# Altium PCB PCB.PcbDoc
Units mil, origin at the board's own origin, x right, y up, seen from the top; angles counter-clockwise.
Board outline 2244.09 x 2125.98 mil, 2 copper layers (Top Layer, Bottom Layer); 47 components, 27 nets, 113 pads, 88 vias.
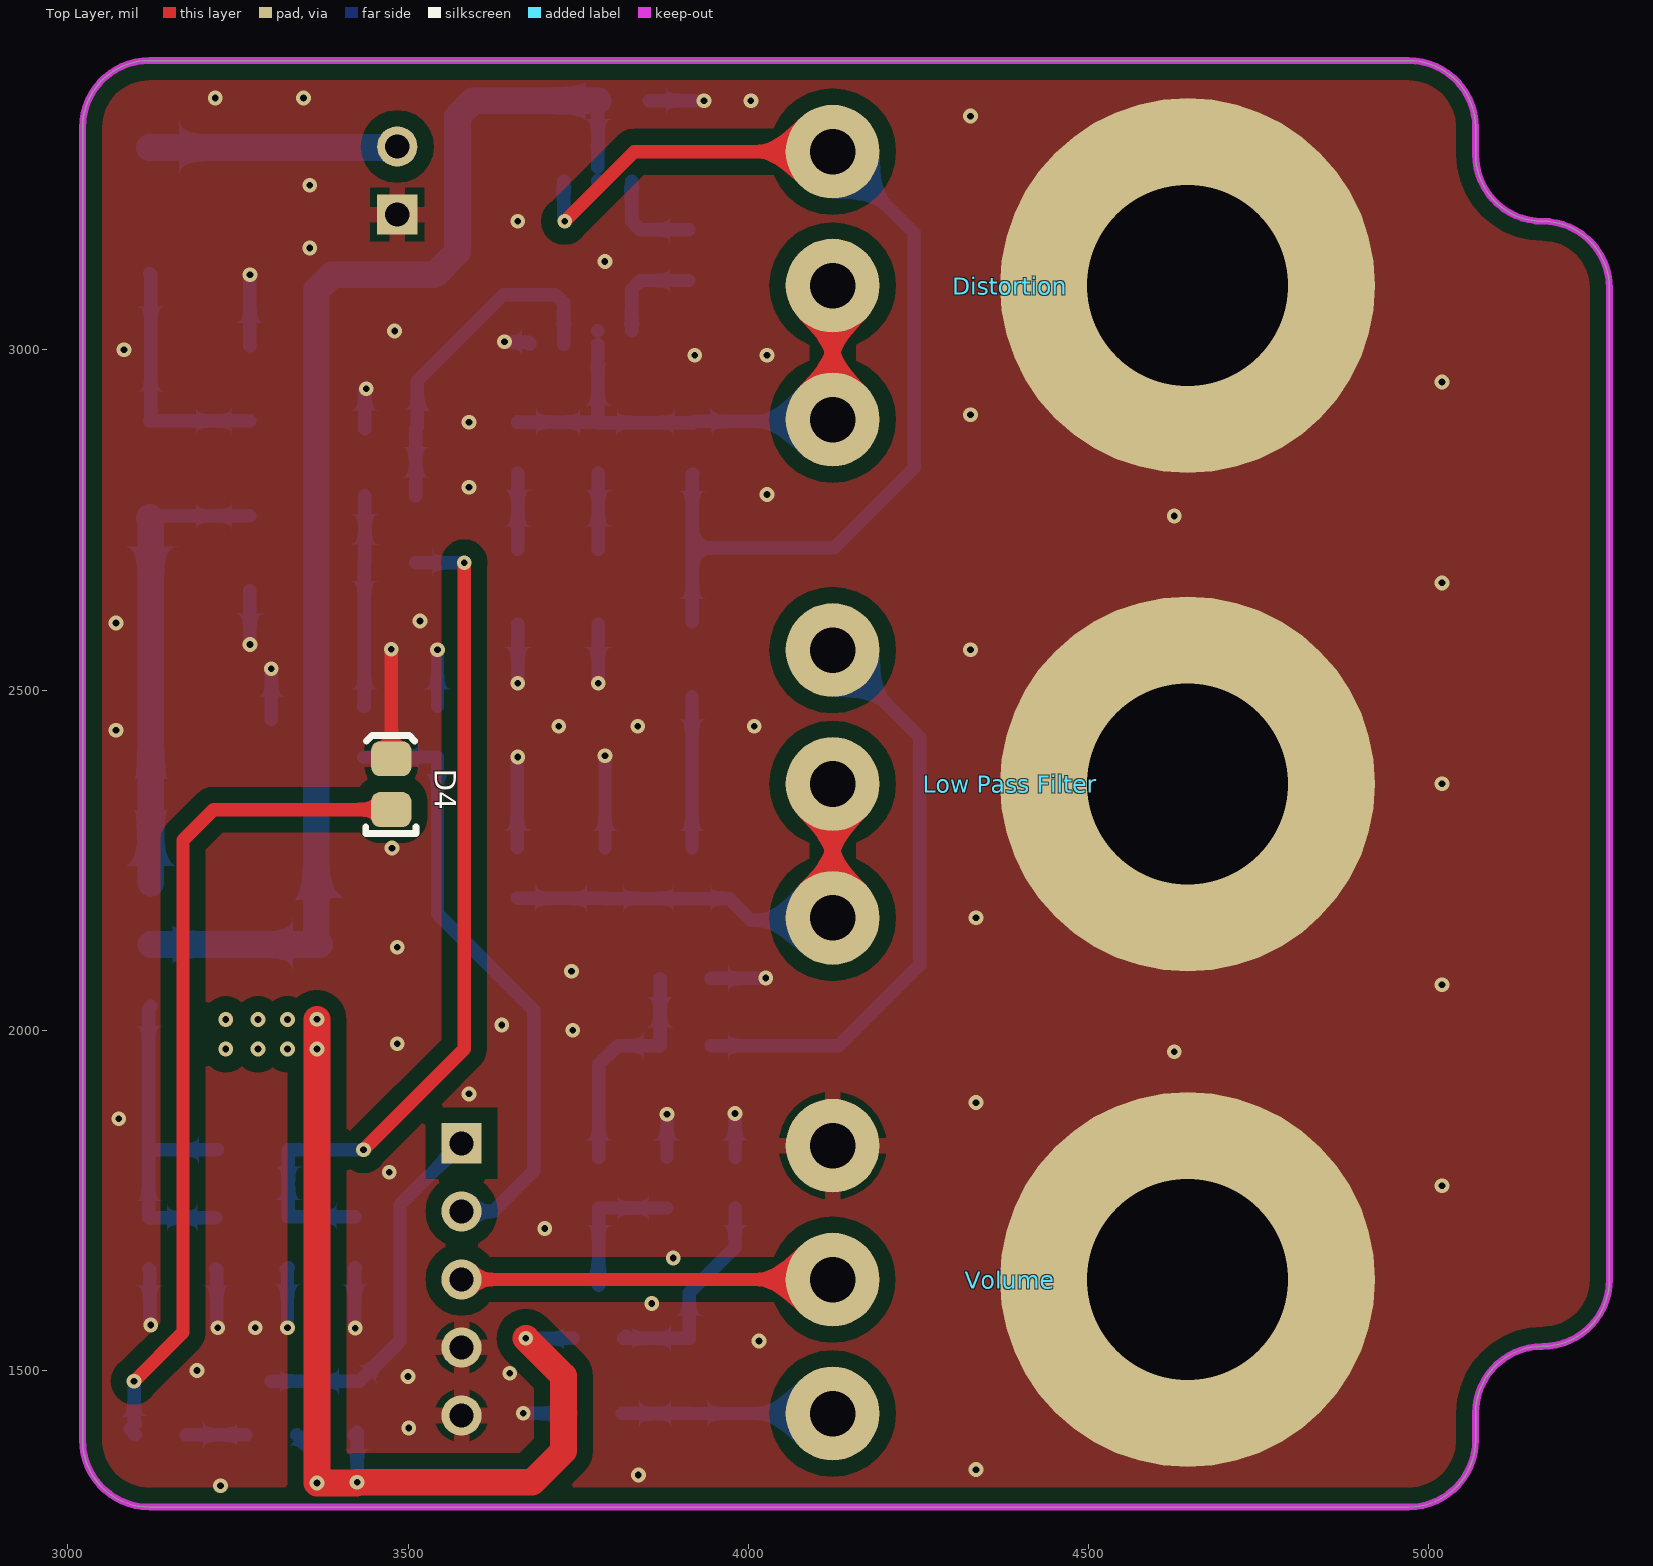
[diagram p0: Top Layer view]
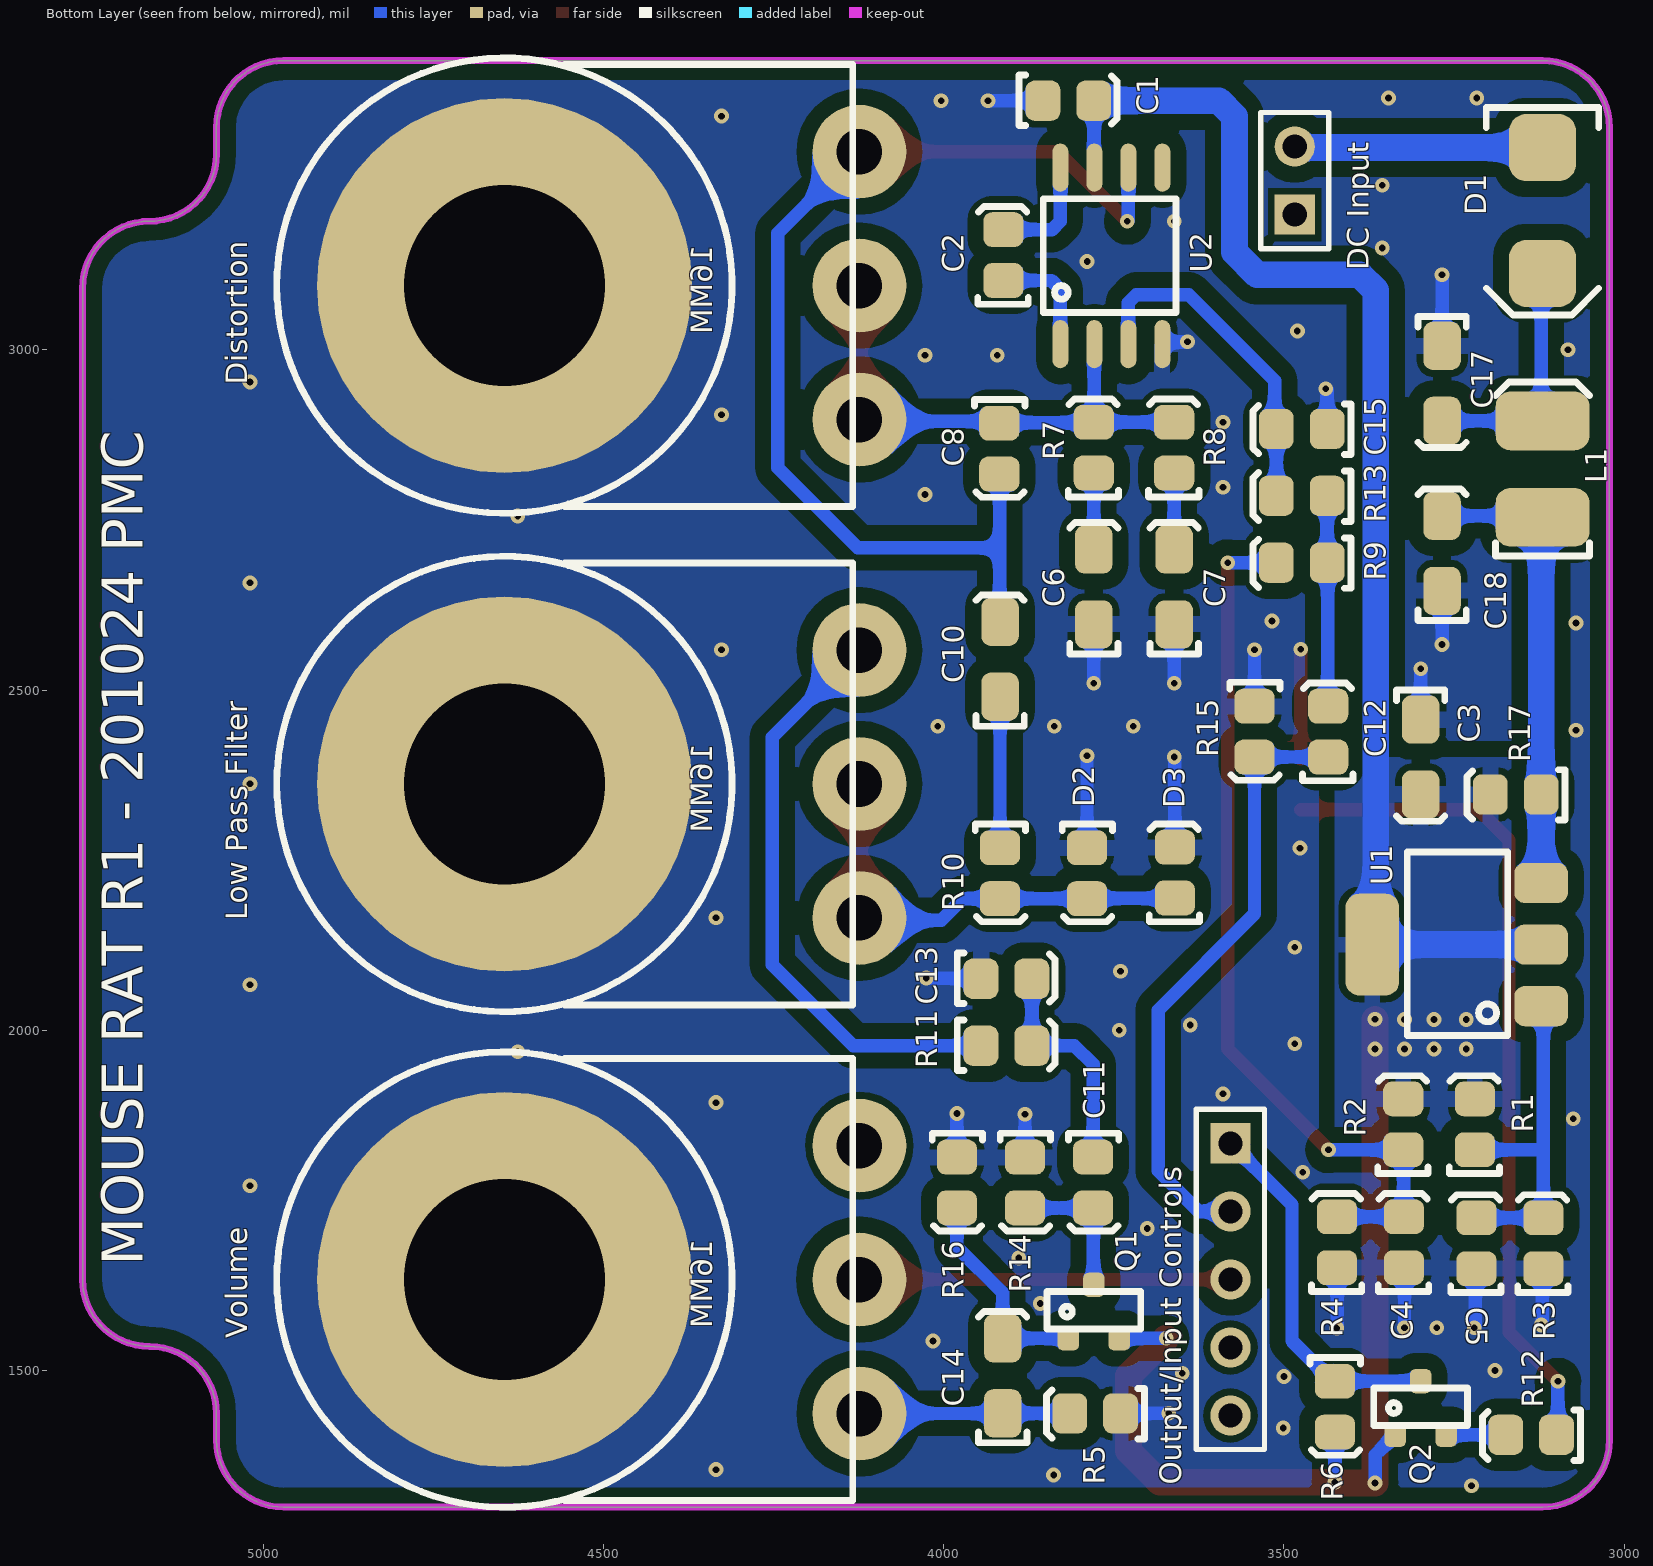
[diagram p1: Bottom Layer view, seen from below]
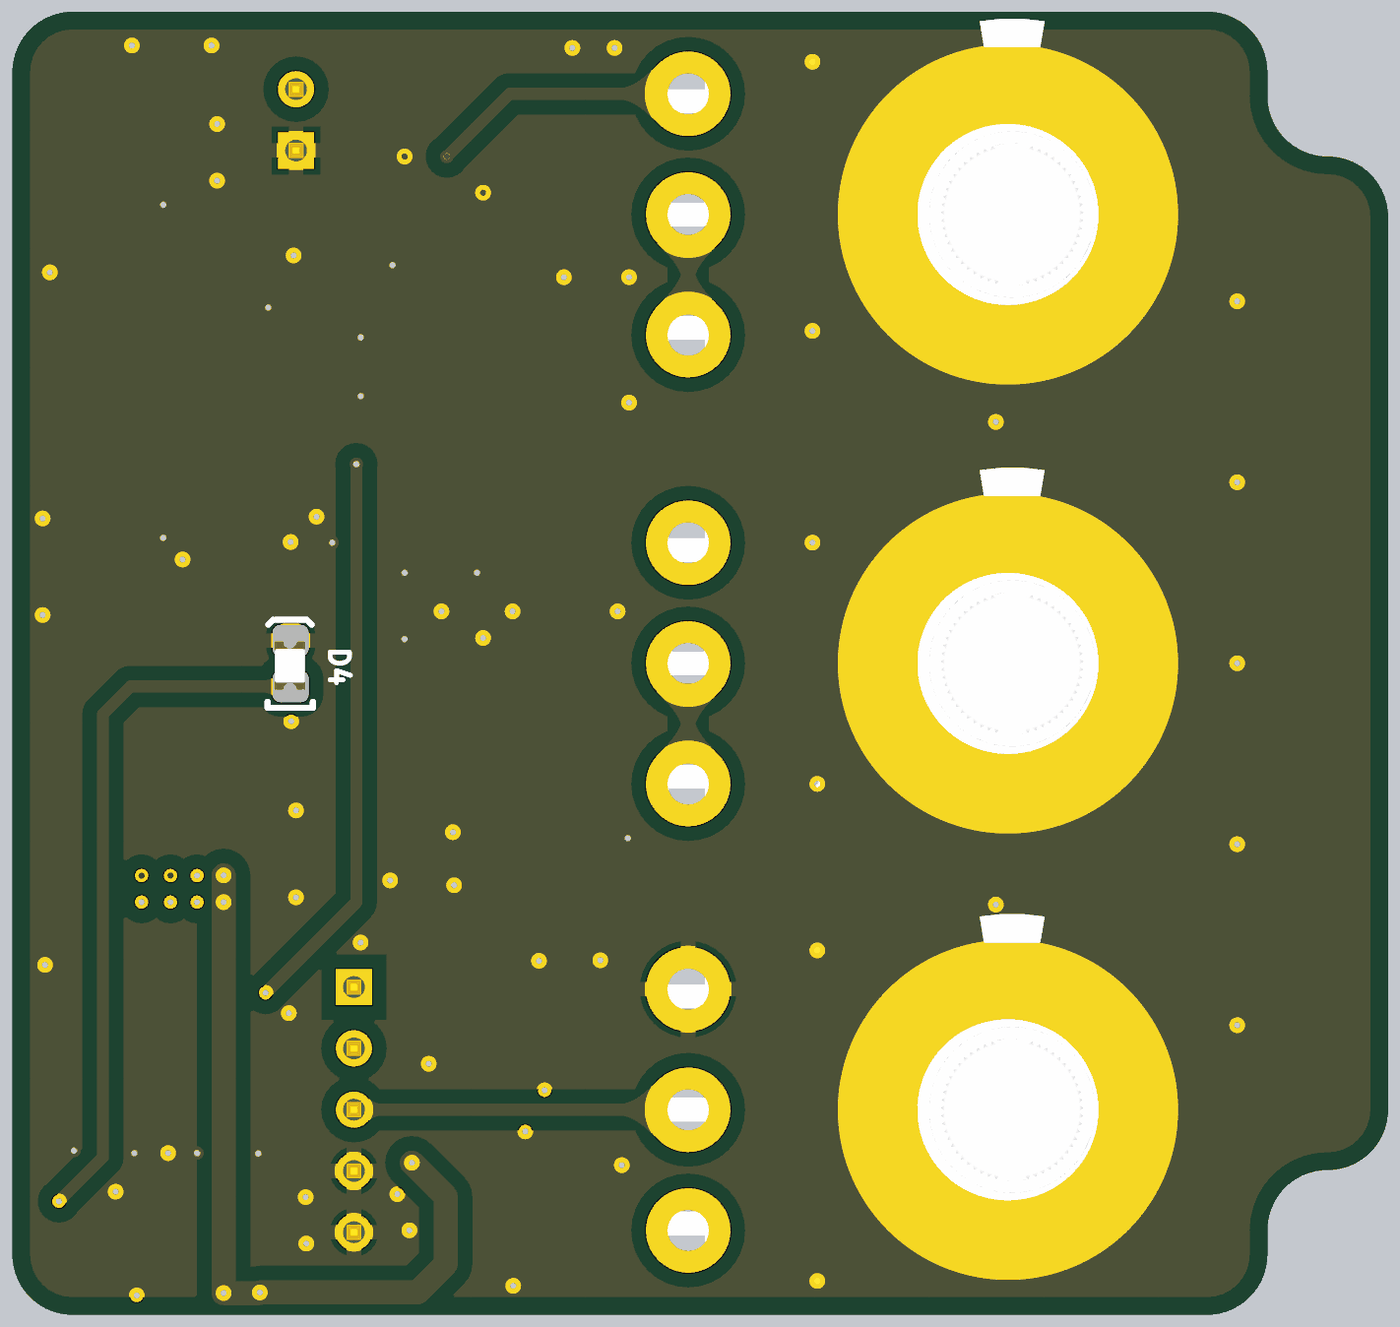
[diagram p2: 3D render of the assembled board from above, using the file's embedded part models]
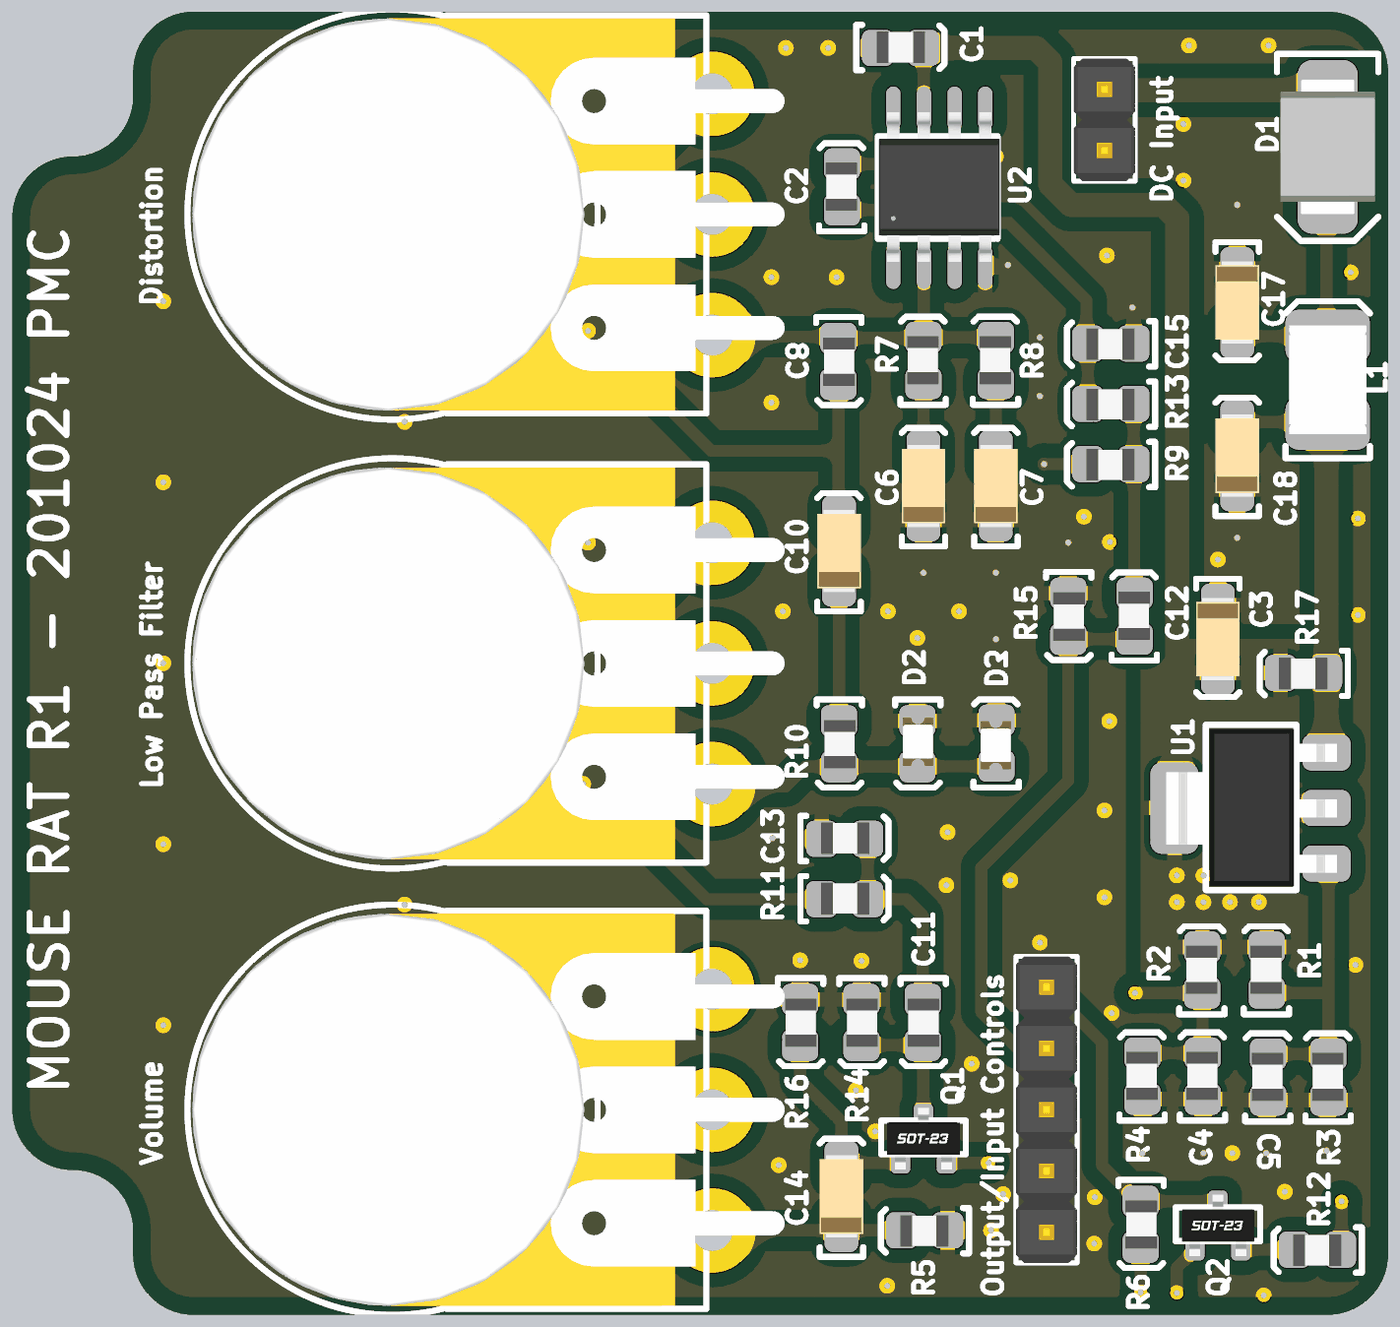
[diagram p3: 3D render of the assembled board from below, using the file's embedded part models]

## Layer stack, top to bottom
Top Solder: solder mask 0.4, Solder Resist, Dk 3.5
Top Layer: signal copper 1.4
Dielectric 1: dielectric 12.6, FR-4, Dk 4.8
Bottom Layer: signal copper 1.4
Bottom Solder: solder mask 0.4, Solder Resist, Dk 3.5

## Board outline
3021.65,1397.64 ccw(c3120.08,1397.64) 3120.08,1299.21 4970.47,1299.21 ccw(c4970.47,1397.64) 5068.9,1397.64 5068.9,1437.01 cw(c5167.32,1437.01) 5167.32,1535.43 ccw(c5167.32,1633.86) 5265.75,1633.86 5265.75,3090.55 ccw(c5167.32,3090.55) 5167.32,3188.98 cw(c5167.32,3287.4) 5068.9,3287.4 5068.9,3326.77 ccw(c4970.47,3326.77) 4970.47,3425.2 3120.08,3425.2 ccw(c3120.08,3326.77) 3021.65,3326.77

## Design rules (kind name [scope] priority, off if disabled: settings)
Clearance [All] p1: gap=10 ignorepadtopadclearanceinfootprint=FALSE except(0: Arc-Hole Track-Hole SMDPad-Hole THPad-Hole Via-Hole Fill-Hole Poly-Hole Region-Hole Text-Hole; 3.94: THPad-THPad; 6: Arc-SMDPad Track-SMDPad SMDPad-SMDPad; 7.87: Arc-THPad Track-THPad SMDPad-THPad THPad-Via; 8: Arc-Arc Arc-Track Arc-Region Track-Track Track-Region SMDPad-Region THPad-Region Via-Region Fill-Region Poly-Region Region-Region; 23.62: Arc-Poly Track-Poly SMDPad-Poly THPad-Poly Via-Poly Fill-Poly Poly-Poly)
Height [All] p1: minheight=0 maxheight=1968.5 prefheight=500
HoleSize [All] p1: absolutevalues=TRUE maxlimit=393.7 minlimit=1 maxpercent=80.000 minpercent=20.000
PlaneClearance [All] p1: clearance=15.75
PlaneConnect [All] p1: pad.planeconnectstyle=Relief pad.reliefexpansion=20 pad.reliefentries=4 pad.reliefconductorwidth=31.5 pad.reliefairgap=10 via.planeconnectstyle=Direct via.reliefexpansion=20 via.reliefentries=4 via.reliefconductorwidth=31.5 via.reliefairgap=10
PolygonConnect PolygonConnect_1 [HasFootprint('Volume-0  Or Filter-0 Or Distortion-0') vs InNet('0V')] p1: connectstyle=Direct reliefconductorwidth=23.62 reliefentries=4 polygonreliefangle="90 Angle" airgapwidth=10
PolygonConnect [All] p2: thpad.connectstyle=Relief thpad.reliefconductorwidth=23.62 thpad.reliefentries=4 thpad.polygonreliefangle="90 Angle" thpad.airgapwidth=10 smdpad.connectstyle=Relief smdpad.reliefconductorwidth=23.62 smdpad.reliefentries=4 smdpad.polygonreliefangle="90 Angle" smdpad.airgapwidth=10 via.connectstyle=Direct via.reliefconductorwidth=23.62 via.reliefentries=4 via.polygonreliefangle="90 Angle" via.airgapwidth=10
RoutingVias [All] p1: holewidth=28 width=50 viastyle="Through Hole" minholewidth=8 minwidth=10 maxholewidth=28 maxwidth=50
SolderMaskExpansion [All] p1: expansion=2 istentingtop=FALSE
Width [All] p1: maxlimit=118.11 minlimit=5 preferedwidth=19.68
26 further rules are at their usual default settings.

## Classes and differential pairs
component class "U_Active Indicator": D4 Q2 R6 R12
component class U_Schematic: C1 C2 C6 C7 C8 C10 C11 C12 C13 C14 C15 D2 D3 Distortion "Low Pass Filter" Q1 R5 R7 R8 R9 R10 R11 R13 R14 R15 R16 U2 Volume
component class "U_Power Supply": C3 C4 C5 C17 C18 D1 L1 R1 R2 R3 R4 R17 U1
component class "Top Level": "DC Input" "Output/Input Controls"

## Components (designator, comment, footprint, x,y, rotation, side; value= is the part's Value field where it differs from the comment)
C1 "100nF" 0805 3816.46,3367.17 r180 bottom
C2 "30pF" 0805 3913.39,3139.76 r90 bottom
C3 "4.7µF" 1206 3299.21,2354.33 r270 bottom
C4 "1µF" 0805 3324.8,1688.98 r90 bottom
C5 "1µF" 0805 3218.3,1687.48 r90 bottom
C6 "4.7µF" 1206 3779.53,2698.82 r90 bottom
C7 "2.2µF" 1206 3661.42,2698.82 r90 bottom
C8 "100pF" 0805 3917.32,2854.33 r270 bottom
C10 "4.7µF" 1206 3917.32,2592.52 r90 bottom
C11 "22nF" 0805 3779.53,1775.76 r270 bottom
C12 "22nF" 0805 3436.07,2439.45 r90 bottom
C13 "2.2nF" 0805 3907.48,2076.77 r180 bottom
C14 "1µF" 1206 3913.39,1539.37 r90 bottom
C15 "1nF" 0805 3474.41,2882.83 r0 bottom
C17 "4.7µF" 1206 3267.59,2903.54 r270 bottom
C18 "4.7µF" 1206 3267.72,2748.03 r90 bottom
D1 "SD560BTR" "SMB Diode" 3120.08,3287.4 r270 bottom
D2 "Red" "0805 LED" 3788.44,2230.38 r270 bottom
D3 "Red" "0805 LED" 3661.42,2232.28 r90 bottom
D4 "Red" "0805 LED" 3474.41,2362.2 r90 top
"DC Input" "2.54mm" "TH 2.54mm Header 1x2" 3484.25,3198.82 r90 bottom
Distortion "A100k (Var)" "16mm PCB Mount Pot" 4645.67,3094.43 r270 top locked
L1 "12uH" 1812 3120.08,2824.8 r90 bottom
"Low Pass Filter" "A100k (Var)" "16mm PCB Mount Pot" 4645.67,2361.94 r270 top
"Output/Input Controls" "2.54mm" "TH 2.54mm Header 1x5" 3578.74,1833.86 r270 bottom
Q1 "2SK3666" "ON SOT-23 JFET" 3779.53,1586.61 r180 bottom
Q2 "2SK3666" "ON SOT-23 JFET" 3299.21,1444.88 r180 bottom
R1 "240R" 0805 3220.47,1862.2 r90 bottom
R2 "100k" 0805 3325.79,1862.2 r90 bottom
R3 "1.5k" 0805 3119.87,1687.48 r90 bottom
R4 "100k" 0805 3423.23,1688.98 r90 bottom
R5 "1M" 0805 3778.03,1435.98 r0 bottom
R6 "10M" 0805 3424.17,1446.38 r270 bottom
R7 "560R" 0805 3780.56,2856.77 r90 bottom
R8 "47R" 0805 3662.45,2856.77 r90 bottom
R9 "1M" 0805 3474.41,2686.11 r0 bottom
R10 "1k" 0805 3916.29,2230.38 r270 bottom
R11 "1.5k" 0805 3907.48,1978.35 r180 bottom
R12 "2.2k" 0805 3137.28,1404.48 r0 bottom
R13 "1k" 0805 3474.41,2784.47 r0 bottom
R14 "1M" 0805 3879.6,1775.76 r270 bottom
R15 "1M" 0805 3542.28,2438.5 r270 bottom
R16 "10k" 0805 3979.67,1775.76 r270 bottom
R17 "0R" 0805 3159.92,2345.43 r0 bottom
U1 "LT3088EST" "LT SOT-223" 3122.05,2035.43 r90 bottom
U2 "OP-07DPSR" "TI 8-SOIC-W" 3728.74,3409.03 r90 bottom
Volume "A100k (Var)" "16mm PCB Mount Pot" 4645.67,1633.6 r270 top locked

## Footprints (in the part's own frame and the unit in brackets; to place one, negate y for a bottom-side part, rotate by r counter-clockwise, add the part's x,y. Pads: shape width x height; smd on the part's side, far side on the other; paste and mask are expansions set on the pad)
"16mm PCB Mount Pot" [mm]
  round 14 hole 7.5: 0(0,0)
  round 3.5 hole 1.7: 1(-5,-13.25) 2(0,-13.25) 3(5,-13.25)
  body extent -8.12,-16.25 8.13,8.3, height 18.2
0805 [mil]
  rrect50% 51.18x59.06 smd: 1(-37.87,-1.03) 2(36.93,-1.03)
  silkscreen extent -73,-37 71,37, body extent -39,-26 39,26, height 29
"0805 LED" [mil]
  rrect50% 51.18x59.06 smd: A(-37.87,-1.03) K(36.93,-1.03)
  silkscreen extent -73,-37 71,37, body extent -43,-25 35,25, height 39
1206 [mm]
  rrect50% 1.8x1.4 smd: 1(-2.6,0) 2(0.2,0)
  silkscreen extent -3.7,-0.9 1.2,0.9, body extent -2.9,-0.9 0.5,0.9, height 1.85
1812 [mm]
  rrect50% 2.2x3.5 smd: 1(-1.8,0) 2(1.8,0)
  silkscreen extent -3.25,-1.75 3.25,1.75, body extent -2.25,-1.6 2.25,1.6, height 2.5
"LT SOT-223" [mm]
  rrect50% 1.5x2 smd: 1(0,0) 2(2.3,0) 3(4.6,0)
  rrect50% 3.8x2 smd: 2(2.3,6.3)
  silkscreen extent -1.1,1.25 5.75,5, body extent -0.92,-0.44 5.58,6.64, height 1.6
"ON SOT-23 JFET" [mm] "NUP2105L"
  rrect50% 0.8x0.9 smd: D(-0.95,-1) G(0,1) S(0.95,-1)
  silkscreen extent -1.75,-0.65 1.75,0.75, body extent -1.5,-1.28 1.5,1.27, height 1
"SMB Diode" [mm]
  rrect50% 2.5x2.5 smd: A(-0.25,0) K(4.45,0)
  silkscreen extent -1.75,-2.1 6,2.1, body extent -0.69,-1.97 4.9,1.97, height 2.5
"TH 2.54mm Header 1x2" [mm]
  rect 1.5x1.5 hole 0.9: 1(0,0)
  round 1.5 hole 0.9: 2(2.54,0)
  silkscreen extent -1.27,-1.27 3.81,1.27, body extent -1.27,-1.27 3.81,1.27, height 9.5
"TH 2.54mm Header 1x5" [mm]
  rect 1.5x1.5 hole 0.9: 1(0,0)
  round 1.5 hole 0.9: 2(2.54,0) 3(5.08,0) 4(7.62,0) 5(10.16,0)
  silkscreen extent -1.27,-1.27 11.43,1.27, body extent -1.27,-1.27 11.43,1.27, height 9.5
"TI 8-SOIC-W" [mm]
  oval 1.8x0.6 smd: 1(-10.177,2.54) 2(-10.177,1.27) 3(-10.177,0) 4(-10.177,-1.27) 5(-3.589,-1.27) 6(-3.589,0) 7(-3.589,1.27) 8(-3.589,2.54)
  silkscreen extent -9,-1.78 -4.75,3.18, body extent -9.96,-1.87 -3.76,3.14, height 1.76

## Part data
C1: library part GCM21BR71H104KA37L, Digikey Part Number=490-6064-1-ND, Manufacturer=muRata, Rated Voltage=50V, Tolerance=±10%, Material=X7R, Part Number=GCM21BR71H104KA37L
C2: library part GCM21B5C1H300JA37L, Digikey Part Number="DO NOT USE FOR NEW DESIGNS", Manufacturer=muRata, Rated Voltage=50V, Tolerance=5%, Material=C0G, Part Number=GCM21B5C1H300JA37L
C3 C6 C10 C17 C18: library part TAJA475K025RNJ, Digikey Part Number=478-11053-1-ND, Manufacturer="AVX Corporation", Rated Voltage=25V, Tolerance=±10%, Material=Tantalum, Part Number=TAJA475K025RNJ
C4 C5: library part GCM21BR71H105KA03L, Digikey Part Number=490-10675-1-ND, Manufacturer=muRata, Rated Voltage=50V, Tolerance=±10%, Material=X7R, Part Number=GCM21BR71H105KA03L
C7: library part TAJA225K025RNJ, Digikey Part Number=478-1662-1-ND, Manufacturer="AVX Corporation", Rated Voltage=25V, Tolerance=±10%, Material=Tantalum, Part Number=TAJA225K025RNJ
C8: library part GCM2165C1H101JA16D, Digikey Part Number=490-8031-1-ND, Manufacturer=muRata, Rated Voltage=50V, Tolerance=±5%, Material="C0G, NP0", Part Number=GCM2165C1H101JA16D
C11 C12: library part GCM21B5C1H223JA16L, Digikey Part Number=490-5318-1-ND, Manufacturer=muRata, Rated Voltage=50V, Tolerance=±5%, Material="C0G, NP0", Part Number=GCM21B5C1H223JA16L
C13: library part GCM2165C1H222JA16D, Digikey Part Number=490-8033-1-ND, Manufacturer=muRata, Rated Voltage=50V, Tolerance=±5%, Material="C0G, NP0", Part Number=GCM2165C1H222JA16D
C14: library part TAJA105K025RNJ, Digikey Part Number=478-2363-1-ND, Manufacturer="AVX Corporation", Rated Voltage=25V, Tolerance=±10%, Material=Tantalum, Part Number=TAJA105K025RNJ
C15: library part GCM2165C1H102JA16D, Digikey Part Number=490-8032-1-ND, Manufacturer=muRata, Rated Voltage=50V, Tolerance=±5%, Material="C0G, NP0", Part Number=GCM2165C1H102JA16D
D1: "1.2V_F 600V 5A SMB", Digikey Part Number=1655-1530-2-ND, Manufacturer="SMC Diode Solutions", Digikey Link=https://www.digikey.com/product-detail/en/smc-diode-solutions/SD560BTR/1655-1530-2-ND/6022620, Part Number=SD560BTR
D2 D3 D4: library part SML-210LTT86, "Red LED Indication - Discrete 1.75V 0805 (2012 Metric)", Digikey Part Number=511-1286-1-ND, Manufacturer="ROHM Semiconductor", Colour=Red, Digikey Link=https://www.digikey.com/product-detail/en/rohm-semiconductor/SML-210LTT86/511-1286-1-ND/637099, Part Number=SML-210LTT86
"DC Input": library part "TH 2.54mm Header 1x2", Angle=0, Contact=NA, Flange=No, Part Number="TH 2.54mm Header 1x2", Pitch=2.54mm, Positions=2, Row Spacing=2.54mm
Distortion "Low Pass Filter" Volume: library part 502-0317, Digikey Part Number=2368-502-0317-ND, Manufacturer="NTE Electronics", Rated Voltage=0.1W, Tolerance=0.2, Part Number=502-0317
L1: library part RLS-126, Digikey Part Number=945-3429-ND, Manufacturer=Recom, Rated Current=800mA, Tolerance=0.2, Impedence=230mOhm, Material=Wirewound, Part Number=RLS-126
"Output/Input Controls": library part "TH 2.54mm Header 1x5", Angle=0, Contact=NA, Flange=No, Part Number="TH 2.54mm Header 1x5", Pitch=2.54mm, Positions=5, Row Spacing=2.54mm
Q1 Q2: "JFET N-Channel 10mA 200mW Surface Mount 3-CP", Digikey Part Number=869-1107-1-ND, Manufacturer="ON Semiconductor", Digikey Link=https://www.digikey.com/product-detail/en/on-semiconductor/2SK3666-3-TB-E/869-1107-1-ND/2165585, LatestRevisionDate=29-May-2009, LatestRevisionNote="IPC-7351 Footprint Added.", PackageDescription="4-Pin SOT-343 Package 1.3 mm Pitch, 2.1 mm Lead Span", PackageReference=SOT-343, PackageVersion=Sep-2000, Part Number=2SK3666, Published=24-Mar-1999, Publisher="Altium Limited"
R1: library part RC0805FR07240RL, Digikey Part Number=311-240CRCT-ND, Manufacturer=YAGEO, Rated Voltage=0.125W, Tolerance=0.01, Material=FR-07, Part Number=RC0805FR07240RL
R2 R4: library part RC0805FR07100KL, Digikey Part Number=311-100KCRCT-ND, Manufacturer=YAGEO, Rated Voltage=0.125W, Tolerance=0.01, Material=FR-07, Part Number=RC0805FR07100KL
R3 R11: library part RC0805FR071K5L, Digikey Part Number=311-1.50KCRCT-ND, Manufacturer=YAGEO, Rated Voltage=0.125W, Tolerance=0.01, Material=FR-07, Part Number=RC0805FR071K5L
R5 R9 R14 R15: library part RC0805FR071ML, Digikey Part Number=311-1.00MCRCT-ND, Manufacturer=YAGEO, Rated Voltage=0.125W, Tolerance=0.01, Material=FR-07, Part Number=RC0805FR071ML
R6: library part RC0805FR0710ML, Digikey Part Number=311-10.0MCRCT-ND, Manufacturer=YAGEO, Rated Voltage=0.125W, Tolerance=0.01, Material=FR-07, Part Number=RC0805FR0710ML
R7: library part RC0805FR07560RL, Digikey Part Number=311-560CRCT-ND, Manufacturer=YAGEO, Rated Voltage=0.125W, Tolerance=0.01, Material=FR-07, Part Number=RC0805FR07560RL
R8: library part RC0805FR0747RL, Digikey Part Number=311-47.0CRCT-ND, Manufacturer=YAGEO, Rated Voltage=0.125W, Tolerance=0.01, Material=FR-07, Part Number=RC0805FR0747RL
R10 R13: library part RC0805FR071KL, Digikey Part Number=311-1.00KCRCT-ND, Manufacturer=YAGEO, Rated Voltage=0.125W, Tolerance=0.01, Material=FR-07, Part Number=RC0805FR071KL
R12: library part RC0805FR072K2L, Digikey Part Number=311-2.20KCRCT-ND, Manufacturer=YAGEO, Rated Voltage=0.125W, Tolerance=0.01, Material=FR-07, Part Number=RC0805FR072K2L
R16: library part RC0805FR0710KL, Digikey Part Number=311-10.0KCRCT-ND, Manufacturer=YAGEO, Rated Voltage=0.125W, Tolerance=0.01, Material=FR-07, Part Number=RC0805FR0710KL
R17: library part RC0805FR070RL, Digikey Part Number=311-0.0CRCT-ND, Manufacturer=YAGEO, Rated Voltage=0.125W, Tolerance=0.01, Material=FR-07, Part Number=RC0805FR070RL
U1: "Linear Voltage Regulator IC Output 800mA SOT-223-3", Digikey Part Number=LT3088EST#PBF-ND, Input Voltage=1.6V-36V, Manufacturer="Linear Technologies", Output Power=800mA, Output Voltage=1.6V-34.5V, Digikey Link=https://www.digikey.com/en/products/detail/analog-devices-inc/LT3088EST-PBF/5297582, Efficiency=0.5, Isolation=Non-Isolated, Part Number=LT3088EST
U2: "General Purpose Amplifier 1 Circuit 8-SO", Digikey Part Number=296-14171-2-ND, Manufacturer="Texas Instruments", Digikey Link=https://www.digikey.com/product-detail/en/texas-instruments/OP-07DPSR/296-14171-2-ND/525998, Part Number=OP-07DPSR

## Via types
v1: diameter 21.65, hole 9.84, Top Layer to Bottom Layer, 88 vias

## Nets (pads, with @x,y where several pads share a name; then routed paths per layer and width w, separated by ;. In a path a pad name is that pad's centre, name@x,y a point inside that pad or via, vN(x,y) a via of type N, cw(c..) or ccw(c..) an arc to the next point about the centre after c; other vN are vias at no path point)
0V: "DC Input.1" "Low Pass Filter.0" "Output/Input Controls.4" "Output/Input Controls.5" C1.1 C3.1 C4.1 C5.1 C6.1 C7.1 C13.1 C15.1 C17.1 C18.1 D2.A D3.K D4.K Distortion.0 R3.1 R4.1 R5.1 R14.1 R15.1 R16.1 U2.4 Volume.0 Volume.1 | length 1751.9
  Top Layer w19.68: D4.K v1(3475.44,2559.99)
  Bottom Layer w19.68: R3.1 3120.45,1648.01 3120.45,1568.53 v1(3122.05,1566.93) ; C5.1 3218.87,1648.01 3218.87,1564.59 v1(3220.47,1562.99) ; C17.1 3267.65,3005.97 v1(3267.72,3110.24) v1(3267.72,3110.24) ; v1(3267.72,2566.93) C18.1 ; C3.1 v1(3299.21,2531.5) ; v1(3322.83,1562.99) 3322.83,1647.17 3321.33,1648.67 C4.1 ; R4.1 3421.73,1650.64 3421.73,1563.21 v1(3422.64,1562.31) ; C15.1 3436.54,2940.47 v1(3438.74,2942.68) ; R15.1 v1(3543.31,2559.06) ; v1(3641.73,3011.81) 3642.11,3011.43 3676.92,3011.43 3678.74,3009.62 U2.4 ; D3.K 3660.39,2400.01 3661.42,2401.04 v1(3661.42,2401.58) ; v1(3661.42,2509.84) C7.1 ; v1(3669.29,1437.01) R5.1 ; v1(3779.53,2509.84) C6.1 ; D2.A v1(3789.47,2403.44) ; C1.1 v1(3935.04,3366.14) ; R14.1 v1(3880.63,1876.69) ; C13.1 3945.87,2076.26 4025.07,2076.26 v1(4025.59,2076.77) ; R16.1 v1(3980.7,1877.56)
  other v1: 3224.41,1330.71 3838.58,1346.46 4334.65,1354.33 3500.98,1415.35 3500,1491.14 3649.61,1496.06 3189.96,1500 4015.75,1543.31 3275.59,1562.99 3858.27,1598.43 3889.76,1665.35 3700.79,1708.66 5019.69,1771.65 3472.44,1791.34 3074.8,1870.08 4334.65,1893.7 3589.57,1906.5 4625.98,1968.5 3484.25,1980.32 3742.13,2000 3637.8,2007.87 5019.69,2066.93 3740.16,2086.61 3484.25,2122.05 4334.65,2165.35 3476.38,2267.72 5019.69,2362.2 3070.87,2440.94 3721.46,2446.85 3837.6,2446.85 4008.86,2446.85 4326.77,2559.06 3070.87,2598.43 3517.72,2601.38 5019.69,2657.48 4625.98,2755.91 4027.56,2787.4 3589.79,2798.17 3589.79,2893.7 4326.77,2904.53 5019.69,2952.76 3921.26,2992.13 4027.56,2992.13 3082.68,3000 3480.32,3027.56 3789.37,3129.92 3355.54,3149.61 3661.42,3188.98 3355.54,3241.99 4326.77,3343.5 4003.94,3366.14 3216.54,3370.08 3346.46,3370.08
4.5V: C4.2 R2.1 R4.2 R9.2 | length 1302.5
  Top Layer w19.68: v1(3434.57,1824.33) 3582.68,1972.44 v1(3582.68,2687.01)
  Bottom Layer w19.68: R4.2 C4.2 3324.26,1726.4 3324.26,1823.84 R2.1 v1(3434.57,1824.33) ; R9.2 3511.4,2687.08 3582.61,2687.08 v1(3582.68,2687.01)
9V: C1.2 C3.2 Q1.S Q2.D R1.2 R2.2 R6.2 R17.2 U1.2 U2.7 | length 3437.2
  Top Layer w39.37: v1(3366.14,2016.12) v1(3366.14,1972.44) v1(3366.14,1334.65) 3424.21,1334.65 v1(3425.2,1335.63) 3682.09,1335.63 3728.35,1381.89 3728.35,1492.13 v1(3673.23,1547.24)
  Bottom Layer w19.68: Q2.D 3366.14,1375.98 v1(3366.14,1334.65) ; v1(3425.2,1335.63) 3425.2,1401.58 3421.26,1405.51 R6.2 ; v1(3673.23,1547.24) Q1.S ; U2.7@3778.74,3248.03 U2.7@3779.13,3248.43 ; U2.7@3779.13,3268.11 3779.13,3365.75 C1.2
  Bottom Layer w39.37: U1.2@3122.05,2125.98 3370.08,2125.98 3365.16,2130.91 3365.16,3087.17 3388.22,3110.24 3539.37,3110.24 3572.83,3143.7 3572.83,3343.08 3595.9,3366.14 C1.2
  other v1: 3232.28,1972.44 3279.53,1972.44 3322.83,1972.44 3232.28,2015.75 3279.53,2015.75 3322.83,2015.75
"From Output": "Output/Input Controls.3" Volume.2 | length 545.4
  Top Layer w19.68: 3578.74,1633.86 3578.87,1633.73 4123.89,1633.73 Volume.2
NetC2_1: C2.1 U2.1 | length 149.8
  Bottom Layer w19.68: U2.1@3828.74,3028.03 3828.74,3088.86 3841.77,3101.89 C2.1
NetC2_2: C2.2 U2.8 | length 147.8
  Bottom Layer w19.68: U2.8@3828.74,3248.03 3828.74,3188.98 3841.03,3176.69 C2.2
NetC5_2: C5.2 R1.1 R3.2 U1.1 | length 510.9
  Bottom Layer w19.68: 3119.36,1824.33 R1.1 ; U1.1 3118.84,2032.23 R3.2 C5.2
NetC6_2: C6.2 R7.1 | length 112.2
  Bottom Layer w19.68: C6.2 R7.1
NetC7_2: C7.2 R8.1 | length 112.2
  Bottom Layer w19.68: C7.2 R8.1
NetC8_1: C8.1 Distortion.2 Distortion.3 R7.2 R8.2 U2.2 | length 781.1
  Top Layer w19.68: Distortion.3 Distortion.2
  Bottom Layer w19.68: R8.2@3661.02,2894.09 R8.2 R7.2 ; U2.2 3779.13,3007.95 3779.13,2894.09 R7.2 ; U2.2@3778.74,3028.03 U2.2@3779.13,3027.64 ; Distortion.3@4092.55,2895.64 Distortion.3@4094.49,2897.58 ; Distortion.3 4121.33,2894.89 3921.04,2894.89 C8.1 3917.61,2892.95 3780.28,2892.95 R7.2
NetC8_2: C8.2 C10.2 Distortion.1 U2.6 | length 1602.5
  Top Layer w19.68: v1(3730.32,3188.98) 3832.62,3291.28 Distortion.1
  Bottom Layer w19.68: U2.6@3728.74,3248.03 3728.74,3190.55 v1(3730.32,3188.98) ; C10.2 3917.84,2600.91 3917.84,2708.9 ; C8.2 3917.84,2816.89 3917.84,2708.9 ; Distortion.1 4244.09,3171.2 4244.09,2826.77 4126.22,2708.9 3917.84,2708.9
NetC10_1: C10.1 R10.1 | length 221.9
  Bottom Layer w19.68: R10.1 C10.1
NetC11_1: C11.1 C13.2 R11.2 | length 336
  Bottom Layer w19.68: C11.1 3780.56,1949.85 3808.02,1977.31 R11.2 C13.2
NetC11_2: C11.2 Q1.G R14.2 | length 214.1
  Bottom Layer w19.68: Q1.G@3780.04,1625.47 Q1.G 3780.04,1626.5 3780.04,1738.32 C11.2 R14.2
NetC12_2: C12.2 R9.1 R13.1 | length 310.4
  Bottom Layer w19.68: C12.2@3435.52,2475.89 C12.2 3435.79,2477.12 3435.79,2686.39 R9.1 R13.1
NetC14_1: C14.1 R5.2 Volume.3 | length 309.2
  Bottom Layer w19.68: R5.2 C14.1 3913.52,1436.88 4123.89,1436.88 Volume.3
NetC14_2: C14.2 Q1.D R16.2 | length 320.1
  Bottom Layer w19.68: Q1.D@3819.88,1550.2 Q1.D C14.2 3913.39,1614.17 3980.7,1681.49 R16.2
NetC15_2: C15.2 R13.2 U2.3 | length 503
  Bottom Layer w19.68: R13.2 C15.2 3513.78,2886.3 3513.78,2954.72 3639.76,3080.71 3717.21,3080.71 3728.74,3069.18 U2.3
NetC17_2: C17.2 D1.K L1.2 | length 365.7
  Bottom Layer w19.68: D1.K 3122.05,3110.24 3122.05,2897.64 L1.2 C17.2
NetC18_2: C18.2 L1.1 R17.1 U1.3 | length 686.7
  Bottom Layer w15: L1.1 L1.1@3122.05,2755.91
  Bottom Layer w19.68: L1.1@3122.05,2755.91 C18.2
  Bottom Layer w39.37: L1.1 3122.05,2751.97 U1.3
NetD2_K: "Low Pass Filter.2" "Low Pass Filter.3" D2.K D3.A R10.2 | length 679.6
  Top Layer w19.68: 4124.02,2165.09 4124.02,2361.94
  Bottom Layer w19.68: D3.A 3660.87,2193.93 3788.99,2193.93 D2.K R10.2@3921.26,2193.45 ; R10.2 3971.91,2193.45 4003.94,2161.42 4120.34,2161.42 4124.02,2165.09
NetD4_A: D4.A R12.1 | length 1235.8
  Top Layer w19.68: v1(3097.44,1484.25) 3169.29,1556.1 3169.29,2279.53 3214.1,2324.33 D4.A
  Bottom Layer w19.68: v1(3097.44,1484.25) 3097.44,1423.23 3099.41,1421.26 3091.53,1413.39 R12.1
"NetLow Pass Filter_1": "Low Pass Filter.1" R11.1 | length 871.3
  Bottom Layer w19.68: R11.1 4132.83,1977.31 4251.97,2096.46 4251.97,2430.84 4124.02,2558.79
NetQ2_S: Q2.S R12.2 | length 87.6
  Bottom Layer w19.68: R12.2 Q2.S
"Output Return Path": "Output/Input Controls.1" Q2.G R6.1 | length 541.5
  Bottom Layer w19.68: Q2.G R6.1 3429.14,1484.25 3488.19,1543.3 3488.19,1743.31 3578.74,1833.86
"Power In": "DC Input.2" D1.A | length 364.8
  Bottom Layer w39.37: D1.A 3482.68,3297.24 3484.25,3298.82
"To Input": "Output/Input Controls.2" C12.1 R15.2 | length 906.2
  Bottom Layer w19.68: C12.1 R15.2 3543.31,2171.26 3685.04,2029.53 3685.04,1793.31 3625.59,1733.86 3578.74,1733.86
pads on no net: U2.5

## Polygon pours and split planes (outlines as drawn)
0V on Bottom Layer "0V_L02_P007" (solid, remove dead copper, pour order 7): 2952.76,3444.88 5314.96,3444.88 5314.96,1279.53 2952.76,1279.53
9V on Bottom Layer "9V_L02_P005" (solid, remove dead copper, pour order 5): 3149.61,2401.57 3149.61,1850.39 3425.2,1850.39 3425.2,2401.57
0V on Top Layer "0V_L01_P003" (solid, remove dead copper, pour order 3): 2952.76,3444.88 5314.96,3444.88 5314.96,1279.53 2952.76,1279.53

## Keep-outs
Keep-Out Layer:
  lines w10: 3021.65,1397.64 ccw(c3120.08,1397.64) 3120.08,1299.21 4970.47,1299.21 ccw(c4970.47,1397.64) 5068.9,1397.64 5068.9,1437.01 cw(c5167.32,1437.01) 5167.32,1535.43 ccw(c5167.32,1633.86) 5265.75,1633.86 5265.75,2362.2 5265.75,3090.55 ccw(c5167.32,3090.55) 5167.32,3188.98 cw(c5167.32,3287.4) 5068.9,3287.4 5068.9,3326.77 ccw(c4970.47,3326.77) 4970.47,3425.2 3120.08,3425.2 ccw(c3120.08,3326.77) 3021.65,3326.77 3021.65,1397.64

## Other copper
Bottom Layer:
  pour cut-out: 3566.93,1471.75 3590.55,1471.75 3616.63,1445.67 3616.63,1422.05 3590.55,1395.97 3566.93,1395.97 3540.85,1422.05 3540.85,1445.67
  pour cut-out: 3566.93,1571.75 3590.55,1571.75 3616.63,1545.67 3616.63,1522.05 3590.55,1495.97 3566.93,1495.97 3540.85,1522.05 3540.85,1545.67
  pour cut-out: 4112.2,1908.56 4135.83,1908.56 4202.13,1842.26 4202.13,1815.34 4139.48,1752.69 4112.56,1752.69 4112.2,1752.33 4049.56,1814.98 4046.26,1814.98 4046.26,1841.54 4055.12,1850.39
  pour cut-out: 3444.72,3238.19 3523.78,3238.19 3523.78,3159.13 3444.72,3159.13

## Silkscreen, mask and mechanical layers (free items; w line width, h text height)
Bottom Overlay:
  text "MOUSE RAT R1 - 201024 PMC" at 5177.32,1653.7 h60 r270
Drill Guide:
  circle w10: c1280.03,1377.69 r59.06
  circle w10: c1280.03,3346.2 r59.06
  circle w10: c5267.43,1377.69 r59.06
  circle w10: c5267.43,3346.2 r59.06
  lines w10: 1082.94,3094.43 5464.04,3094.43 ; 1083.18,1633.6 5464.28,1633.6 ; 1083.18,2361.94 5464.28,2361.94 ; 1083.18,1377.69 ccw(c1280.03,1377.69) 1280.03,1180.84 5267.43,1180.84 ccw(c5267.43,1377.69) 5464.28,1377.69 5464.28,3346.2 ccw(c5267.43,3346.2) 5267.43,3543.05 1280.03,3543.05 ccw(c1280.03,3346.2) 1083.18,3346.2 1083.18,1377.69 ; 1142.23,1476.12 1280.03,1476.12 cw(c1280.03,1377.69) 1378.45,1377.69 1378.45,1239.9 5169,1239.9 5169,1377.69 cw(c5267.43,1377.69) 5267.43,1476.12 5405.22,1476.12 5405.22,3247.77 5267.43,3247.77 cw(c5267.43,3346.2) 5169,3346.2 5169,3483.99 1378.45,3483.99 1378.45,3346.2 cw(c1280.03,3346.2) 1280.03,3247.77 1142.23,3247.77 1142.23,1476.12 ; 1496.34,1974.97 1966.34,1974.97 1966.34,2715.97 1496.34,2715.97 1496.34,1974.97

## Dimensions
3021.65,3326.77 to 5265.75,3090.55 on Drill Drawing
4970.47,3425.2 to 4970.47,1299.21 on Drill Drawing

## Text inside footprints (layer, text, board x,y; h text height)
Distortion: Bottom Overlay "16MM" at 4340.55,3153.49 h31.5 r270
"Low Pass Filter": Bottom Overlay "16MM" at 4340.55,2421 h31.5 r270
Volume: Bottom Overlay "16MM" at 4340.55,1692.65 h31.5 r270